# EAGLE board ThermistorPCB (EAGLE 7.5.0)
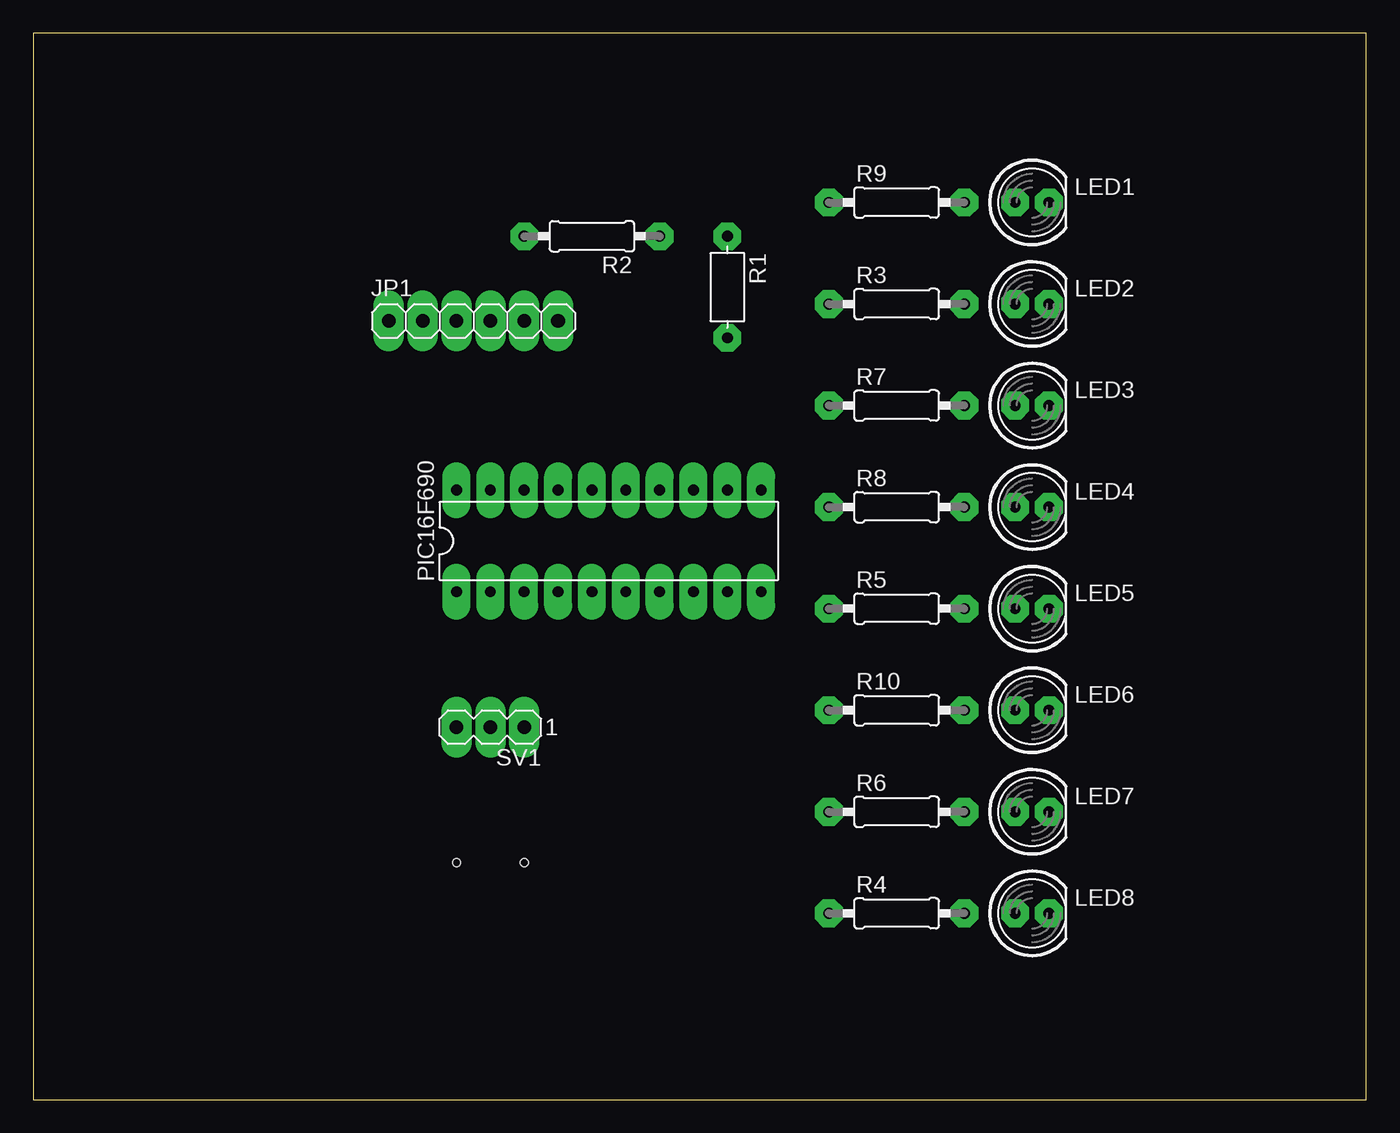
[diagram p0: board, top side]
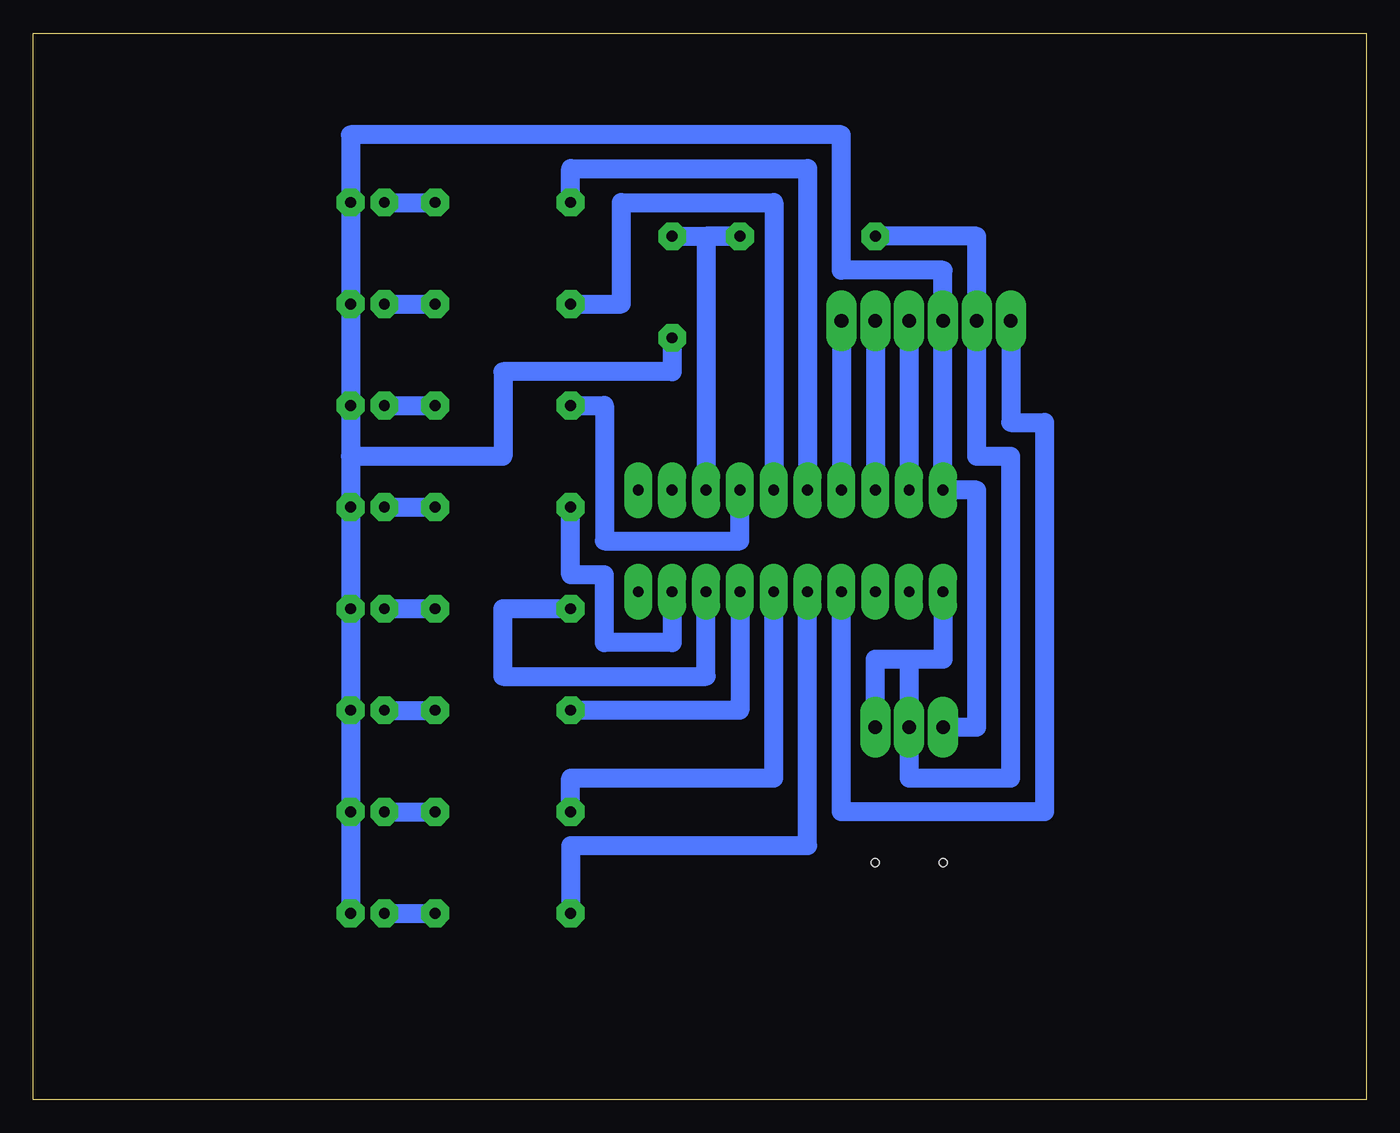
[diagram p1: board, bottom side, seen from below]

Size 100 x 80 mm. Coordinates in mm from the lower left corner, seen from the top.
Outline: 0,0 100,0 100,80 0,80 0,0
Copper layers (1*16): Top 0.035mm / dielectric 1.5mm / Bottom 0.035mm
Design rules "default *": minimum track width 10mil, minimum drill 24mil, track to track 8mil, track to pad 8mil, pad to pad 8mil, via to via 8mil, smd to smd 8mil, copper to edge 40mil, drill to drill 8mil, minimum pad ring 25mil, minimum via ring 8mil, stop-mask expansion 4mil, vias tented up to drill 0mil, thermal gap 10mil
Holes 0.6 mm at 31.75,17.78 36.83,17.78

## Footprints (pad centres in the part's own frame; a part is rotated, then mirrored left to right if it is on the bottom)
1X06 = drill 1.016 long: 1 -6.35,0; 2 -3.81,0; 3 -1.27,0; 4 1.27,0; 5 3.81,0; 6 6.35,0
LED5MM = drill 0.813 octagon: A -1.27,0; K 1.27,0
DIL20 = drill 0.813 long: 1 -11.43,-3.81; 2 -8.89,-3.81; 3 -6.35,-3.81; 4 -3.81,-3.81; 5 -1.27,-3.81; 6 1.27,-3.81; 7 3.81,-3.81; 8 6.35,-3.81; 9 8.89,-3.81; 10 11.43,-3.81; 11 11.43,3.81; 12 8.89,3.81; 13 6.35,3.81; 14 3.81,3.81; 15 1.27,3.81; 16 -1.27,3.81; 17 -3.81,3.81; 18 -6.35,3.81; 19 -8.89,3.81; 20 -11.43,3.81
R-7,5 = drill 0.813 octagon: 1 -3.81,0; 2 3.81,0
0207/10 = drill 0.813 octagon: 1 -5.08,0; 2 5.08,0
MA03-1 = drill 1.016 long: 1 -2.54,0; 2 0,0; 3 2.54,0

## Placement (x,y rotation side)
JP1  [1X06]  33.02,58.42 0 top
LED1  220R  [LED5MM]  74.93,67.31 0 top
LED2  220R  [LED5MM]  74.93,59.69 0 top
LED3  220R  [LED5MM]  74.93,52.07 0 top
LED4  220R  [LED5MM]  74.93,44.45 0 top
LED5  220R  [LED5MM]  74.93,36.83 0 top
LED6  220R  [LED5MM]  74.93,29.21 0 top
LED7  220R  [LED5MM]  74.93,21.59 0 top
LED8  220R  [LED5MM]  74.93,13.97 0 top
PIC16F690  [DIL20]  43.18,41.91 0 top
R1  THERMISTOR-7,5  [R-7,5]  52.07,60.96 270 top
R2  10K  [0207/10]  41.91,64.77 180 top
R3  [0207/10]  64.77,59.69 0 top
R4  [0207/10]  64.77,13.97 0 top
R5  [0207/10]  64.77,36.83 0 top
R6  [0207/10]  64.77,21.59 0 top
R7  [0207/10]  64.77,52.07 0 top
R8  [0207/10]  64.77,44.45 0 top
R9  [0207/10]  64.77,67.31 0 top
R10  [0207/10]  64.77,29.21 0 top
SV1  [MA03-1]  34.29,27.94 180 top

## Library data of the parts
JP1 = pinhead
LED1-LED8 = led
PIC16F690 = ic-package
R1 = varistor
R2-R10 = rcl
SV1 = con-lstb; OC_FARNELL: unknown; OC_NEWARK: unknown

## Nets
+5V: JP1.2 PIC16F690.1 R2.2 SV1.1
N$1: PIC16F690.14 R7.1
N$2: JP1.4 PIC16F690.19
N$3: JP1.5 PIC16F690.18
N$4: JP1.6 PIC16F690.17
N$5: LED7.A R6.2
N$6: LED8.A R4.2
N$7: LED6.A R10.2
N$8: LED5.A R5.2
N$9: LED4.A R8.2
N$10: LED3.A R7.2
N$11: LED2.A R3.2
N$12: LED1.A R9.2
N$13: PIC16F690.16 R9.1
N$14: PIC16F690.15 R3.1
N$15: PIC16F690.9 R8.1
N$16: PIC16F690.8 R5.1
N$17: JP1.1 PIC16F690.4
N$18: PIC16F690.7 R10.1
N$19: PIC16F690.6 R6.1
N$20: PIC16F690.5 R4.1
N$22: PIC16F690.13 R1.1 R2.1
PE: JP1.3 LED1.K LED2.K LED3.K LED4.K LED5.K LED6.K LED7.K LED8.K PIC16F690.20 R1.2 SV1.3

## Tracks (layer width: path | path; a pad name or v marks a point on that pad's centre or on a via)
+5V
  Bottom 1.422: R2.2 29.21,64.77 JP1.2 29.21,48.26 26.67,48.26 26.67,24.13 34.29,24.13 34.29,33.02 | SV1.1 36.83,33.02 34.29,33.02 | PIC16F690.1 31.75,33.02 34.29,33.02
N$1
  Bottom 1.422: PIC16F690.14 46.99,41.91 57.15,41.91 57.15,52.07 R7.1
N$2
  Bottom 1.422: JP1.4 PIC16F690.19
N$3
  Bottom 1.422: JP1.5 PIC16F690.18
N$4
  Bottom 1.422: JP1.6 PIC16F690.17
N$5
  Bottom 1.422: LED7.A R6.2
N$6
  Bottom 1.422: LED8.A R4.2
N$7
  Bottom 1.422: LED6.A R10.2
N$8
  Bottom 1.422: LED5.A R5.2
N$9
  Bottom 1.422: LED4.A R8.2
N$10
  Bottom 1.422: LED3.A R7.2
N$11
  Bottom 1.422: LED2.A R3.2
N$12
  Bottom 1.422: LED1.A R9.2
N$13
  Bottom 1.422: R9.1 59.69,69.85 41.91,69.85 PIC16F690.16
N$14
  Bottom 1.422: PIC16F690.15 44.45,67.31 55.88,67.31 55.88,59.69 R3.1
N$15
  Bottom 1.422: PIC16F690.9 52.07,34.29 57.15,34.29 57.15,39.37 59.69,39.37 R8.1
N$16
  Bottom 1.422: PIC16F690.8 49.53,31.75 64.77,31.75 64.77,36.83 R5.1
N$17
  Bottom 1.422: JP1.1 26.67,50.8 24.13,50.8 24.13,21.59 39.37,21.59 PIC16F690.4
N$18
  Bottom 1.422: PIC16F690.7 46.99,29.21 R10.1
N$19
  Bottom 1.422: R6.1 59.69,24.13 44.45,24.13 PIC16F690.6
N$20
  Bottom 1.422: PIC16F690.5 41.91,19.05 59.69,19.05 R4.1
N$22
  Bottom 1.422: R1.1 R2.1 49.53,64.77 PIC16F690.13
PE
  Bottom 1.422: 76.2,48.26 LED3.K LED2.K LED1.K 76.2,72.39 39.37,72.39 39.37,62.23 31.75,62.23 JP1.3 PIC16F690.20 29.21,45.72 29.21,27.94 SV1.3 | 76.2,48.26 LED4.K LED5.K LED6.K LED7.K LED8.K | R1.2 52.07,54.61 64.77,54.61 64.77,48.26 76.2,48.26